# EAGLE board SIDaster_V4 (EAGLE 5.10)
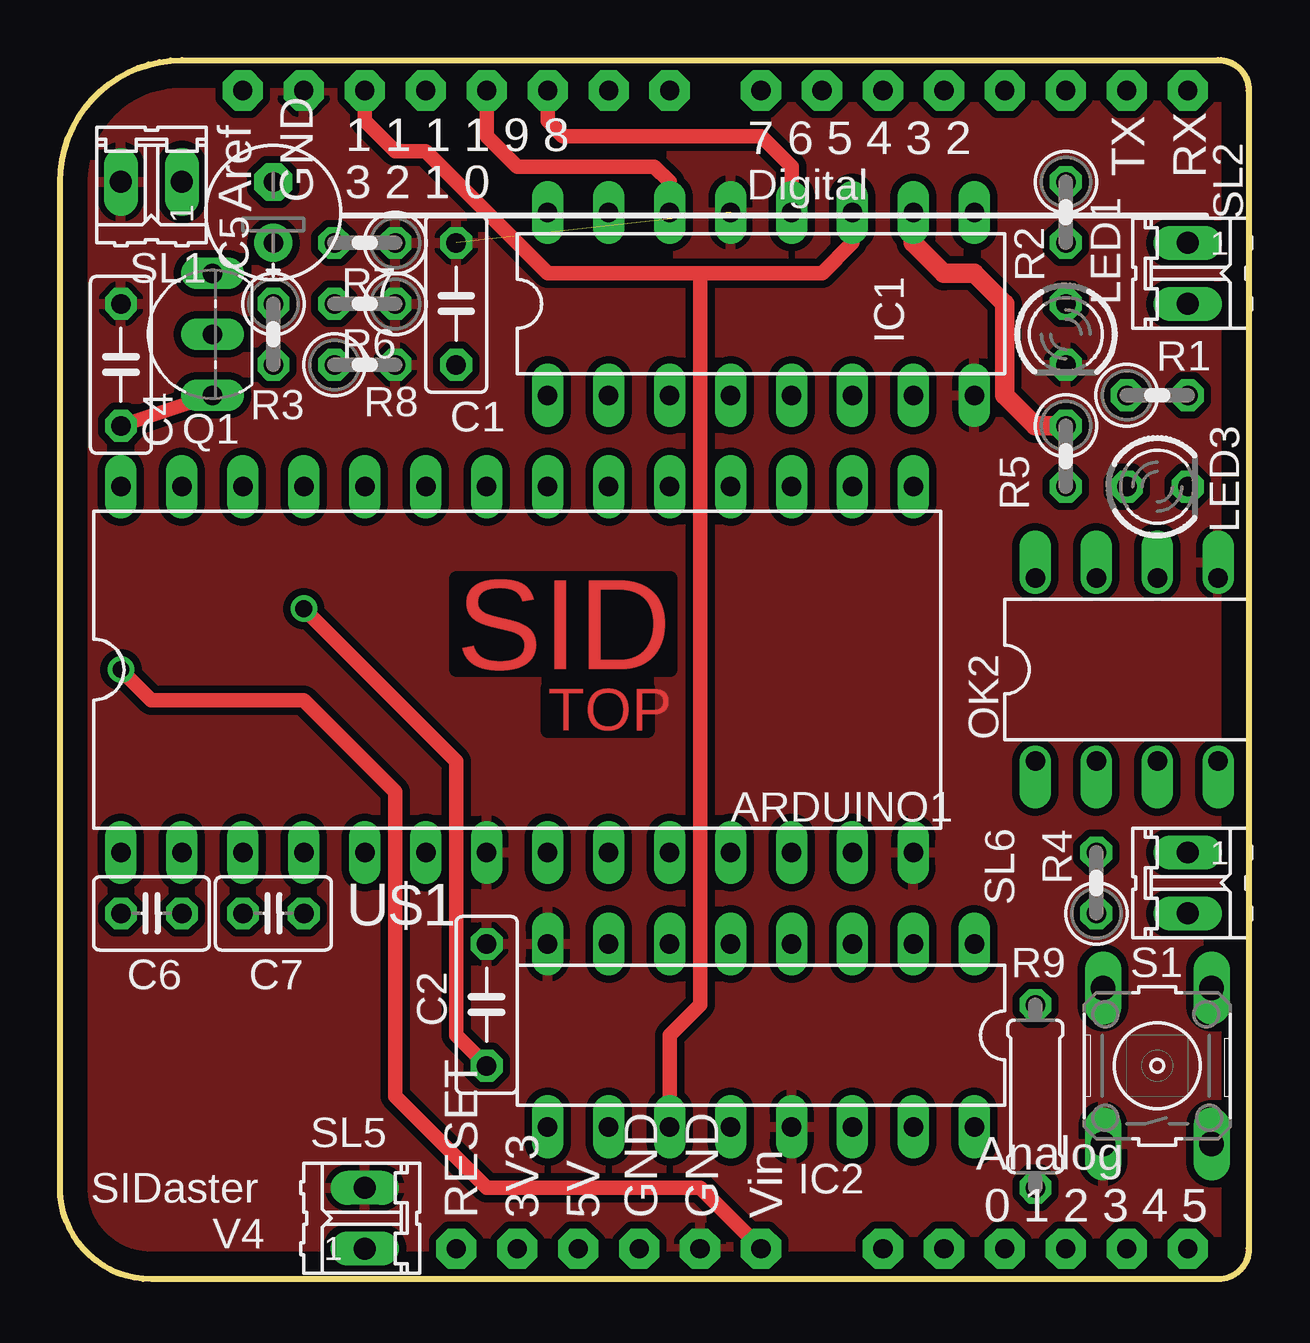
[diagram p0: board, top side]
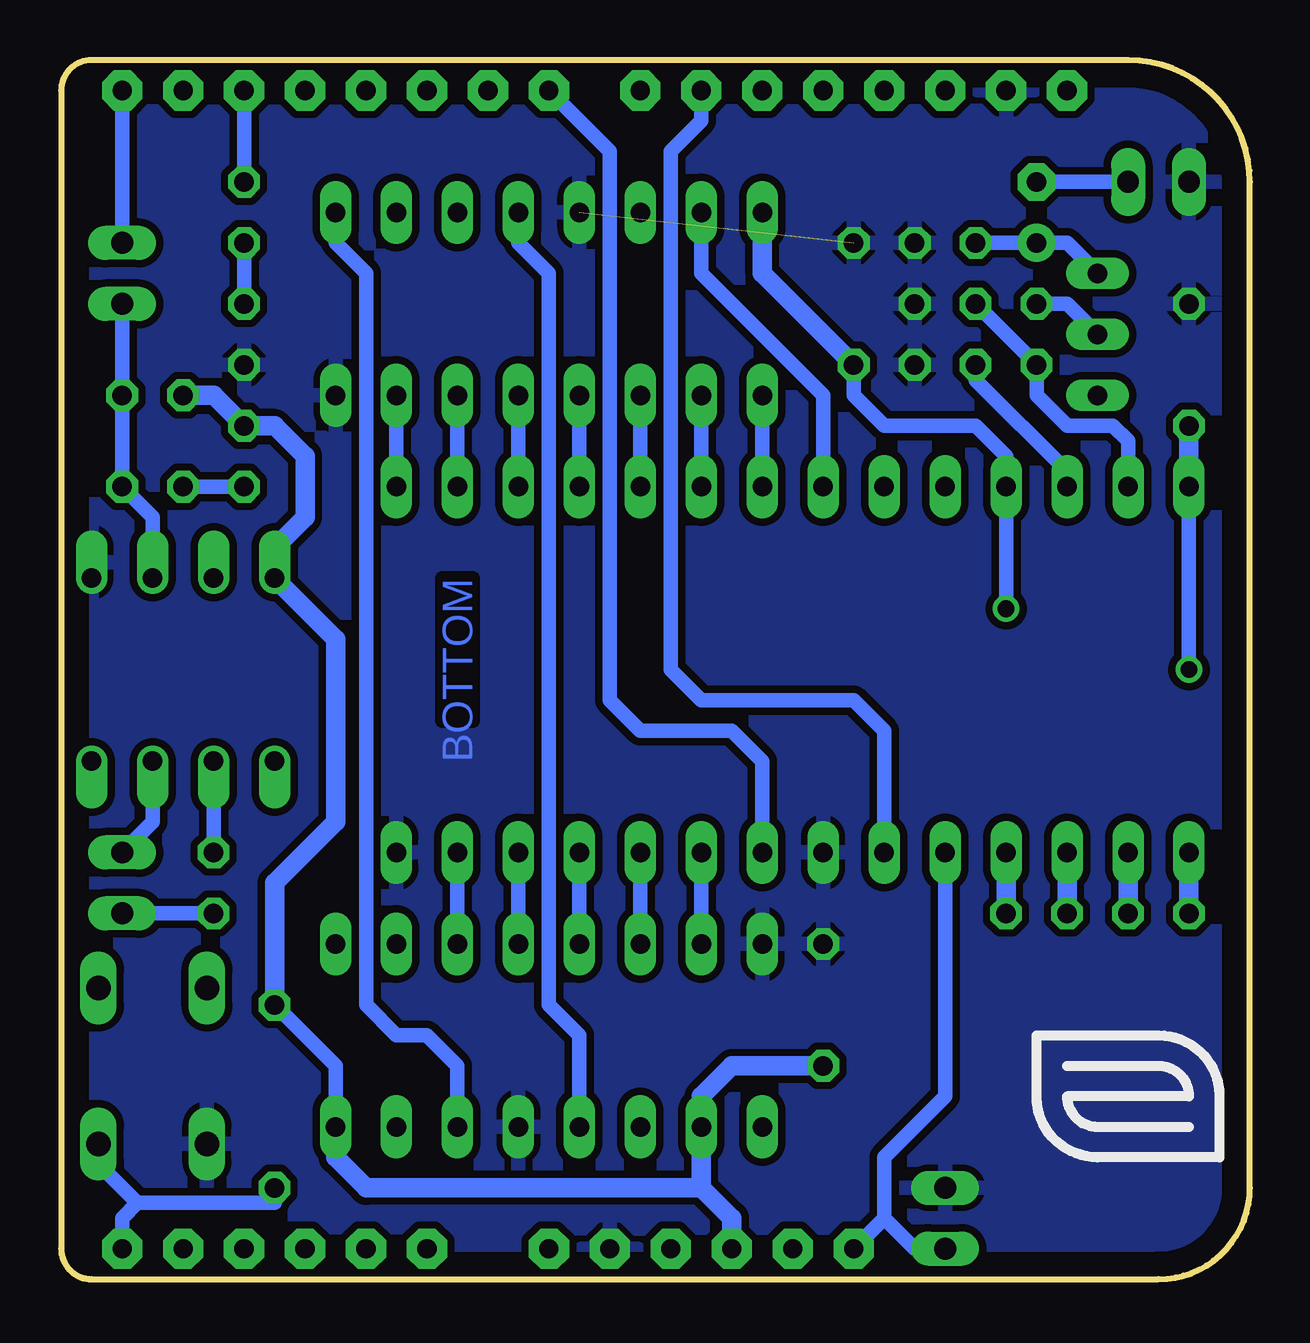
[diagram p1: board, bottom side, seen from below]

Size 49.53 x 50.8 mm. Coordinates in mm from the lower left corner, seen from the top.
Outline: 3.81,0 arc-90 0,3.81 0,45.72 arc-90 5.08,50.8 48.26,50.8 arc-90 49.53,49.53 49.53,1.27 arc-90 48.26,0 3.81,0
Copper layers (1*16): Top 0.035mm / dielectric 1.5mm / Bottom 0.035mm
Design rules "default *": minimum track width 10mil, minimum drill 24mil, track to track 12mil, track to pad 12mil, pad to pad 11mil, via to via 11mil, smd to smd 8mil, copper to edge 40mil, drill to drill 8mil, minimum pad ring 10mil, minimum via ring 8mil, stop-mask expansion 4mil, vias tented up to drill 0mil, thermal gap 10mil

## Footprints (pad centres in the part's own frame; a part is rotated, then mirrored left to right if it is on the bottom)
ARDUINO_DUEMILANOVE = drill 0.8 pad 1.676 octagon: 1 -21.59,22.86; 2 -19.05,22.86; 3 -16.51,22.86; 4 -13.97,22.86; 5 -11.43,22.86; 6 -8.89,22.86; 7 -6.35,22.86; 8 -3.81,22.86; 9 0,22.86; 10 2.54,22.86; 11 5.08,22.86; 12 7.62,22.86; 13 10.16,22.86; 14 12.7,22.86; 15 15.24,22.86; 16 17.78,22.86; 17 17.78,-25.4; 18 15.24,-25.4; 19 12.7,-25.4; 20 10.16,-25.4; 21 7.62,-25.4; 22 5.08,-25.4; 23 0,-25.4; 24 -2.54,-25.4; 25 -5.08,-25.4; 26 -7.62,-25.4; 27 -10.16,-25.4; 28 -12.7,-25.4
C050-025X075 = drill 0.813 octagon: 1 -2.54,0; 2 2.54,0
E2,5-6E = drill 0.813 pad 1.575 round: + -1.27,0 | drill 0.813 pad 1.575 octagon: - 1.27,0
C025-030X050 = drill 0.813 octagon: 1 -1.27,0; 2 1.27,0
DIL16 = drill 0.813 long: 1 -8.89,-3.81; 2 -6.35,-3.81; 3 -3.81,-3.81; 4 -1.27,-3.81; 5 1.27,-3.81; 6 3.81,-3.81; 7 6.35,-3.81; 8 8.89,-3.81; 9 8.89,3.81; 10 6.35,3.81; 11 3.81,3.81; 12 1.27,3.81; 13 -1.27,3.81; 14 -3.81,3.81; 15 -6.35,3.81; 16 -8.89,3.81
LED3MM = drill 0.813 octagon: A -1.27,0; K 1.27,0
DIL08 = drill 0.813 offset: 1 -3.81,-3.81; 2 -1.27,-3.81; 3 1.27,-3.81; 4 3.81,-3.81; 5 3.81,3.81; 6 1.27,3.81; 7 -1.27,3.81; 8 -3.81,3.81
TO92-EBC = drill 0.813 long: B 0,-1.27; C -2.54,-1.27; E 2.54,-1.27
0207/2V = drill 0.813 octagon: 1 -1.27,0; 2 1.27,0
0207/7 = drill 0.813 octagon: 1 -3.81,0; 2 3.81,0
B3F-10XX = drill 1.016 long: 1 -3.251,2.261; 2 3.251,2.261; 3 -3.251,-2.261; 4 3.251,-2.261
02P = drill 0.914 long: 1 -1.27,0; 2 1.27,0
MOS6581 = drill 0.813 long: A0 3.81,-7.62; A1 6.35,-7.62; A2 8.89,-7.62; A3 11.43,-7.62; A4 13.97,-7.62; CAP1A -16.51,-7.62; CAP1B -13.97,-7.62; CAP2A -11.43,-7.62; CAP2B -8.89,-7.62; CS 1.27,-7.62; D0 16.51,7.62; D1 13.97,7.62; D2 11.43,7.62; D3 8.89,7.62; D4 6.35,7.62; D5 3.81,7.62; D6 1.27,7.62; D7 -1.27,7.62; EXTIN -11.43,7.62; GND 16.51,-7.62; O2 -3.81,-7.62; OUT -13.97,7.62; POTX -6.35,7.62; POTY -3.81,7.62; R/W -1.27,-7.62; RES -6.35,-7.62; VCC -8.89,7.62; VDD -16.51,7.62

## Placement (x,y rotation side)
ARDUINO1  ARDUINO_DUEMILANOVE  [ARDUINO_DUEMILANOVE]  29.21,26.67 0 top
C1  100n  [C050-025X075]  16.51,40.64 90 top
C2  100n  [C050-025X075]  17.78,11.43 90 top
C4  100n  [C050-025X075]  2.54,38.1 90 top
C5  10u  [E2,5-6E]  8.89,44.45 90 top
C6  2n  [C025-030X050]  3.81,15.24 0 top
C7  2n  [C025-030X050]  8.89,15.24 0 top
IC1  74HC595N  [DIL16]  29.21,40.64 0 top
IC2  74HC595N  [DIL16]  29.21,10.16 180 top
LED1  [LED3MM]  41.91,39.37 270 top
LED3  [LED3MM]  45.72,33.02 0 top
OK2  6N138  [DIL08]  44.45,25.4 0 top
Q1  BC447  [TO92-EBC]  5.08,39.37 90 top
R1  220  [0207/2V]  45.72,36.83 0 top
R2  1k  [0207/2V]  41.91,44.45 270 top
R3  10k  [0207/2V]  8.89,39.37 270 top
R4  220  [0207/2V]  43.18,16.51 90 top
R5  1k  [0207/2V]  41.91,34.29 270 top
R6  1k  [0207/2V]  12.7,40.64 180 top
R7  1k  [0207/2V]  12.7,43.18 180 top
R8  1k  [0207/2V]  12.7,38.1 0 top
R9  10k  [0207/7]  40.64,7.62 270 top
S1  [B3F-10XX]  45.72,8.89 90 top
SL1  OUT  [02P]  3.81,45.72 180 top
SL2  MIDI  [02P]  46.99,41.91 270 top
SL5  RES  [02P]  12.7,2.54 90 top
SL6  MidiIn  [02P]  46.99,16.51 270 top
U$1  MOS6581  [MOS6581]  19.05,25.4 0 top

## Library data of the parts
ARDUINO1 = arduino
C1 C2 C4-C7 R1-R9 = rcl
IC1 IC2 = 74xx-eu
LED1 LED3 = led
OK2 = optocoupler
Q1 = transistor-npn
S1 = switch-omron
SL1 SL2 SL5 SL6 = con-amp-quick
U$1 = MOS6581

## Nets
3V3: ARDUINO1.27
GND: ARDUINO1.2 ARDUINO1.24 C1.2 C2.2 C4.2 IC1.8 IC1.13 IC2.8 IC2.13 LED1.K OK2.5 R6.1 R7.1 R8.2 S1.1 SL1.2 SL5.2 U$1.GND U$1.R/W
N$1: IC1.7 U$1.D0
N$2: IC1.6 U$1.D1
N$3: IC1.5 U$1.D2
N$4: IC1.4 U$1.D3
N$5: IC1.3 U$1.D4
N$6: IC1.2 U$1.D5
N$7: IC1.1 U$1.D6
N$8: IC2.7 U$1.A0
N$9: IC1.9 IC2.14
N$10: ARDUINO1.7 U$1.O2
N$11: IC2.6 U$1.A1
N$12: IC2.5 U$1.A2
N$13: IC2.4 U$1.A3
N$14: IC2.3 U$1.A4
N$15: IC1.15 U$1.D7
N$16: ARDUINO1.5 IC1.14
N$17: ARDUINO1.9 U$1.CS
N$18: R4.1 SL6.2
N$19: ARDUINO1.28 SL5.1 U$1.RES
N$20: ARDUINO1.3 IC1.11 IC2.11
N$21: C5.- SL1.1
N$22: R3.2 R6.2 U$1.OUT
N$23: OK2.2 R4.2
N$24: C6.1 U$1.CAP1A
N$25: C6.2 U$1.CAP1B
N$26: C7.1 U$1.CAP2A
N$27: C7.2 U$1.CAP2B
N$28: LED1.A R2.2
N$29: ARDUINO1.14 R2.1
N$30: OK2.3 SL6.1
N$31: LED3.K OK2.6 R1.2 SL2.2
N$32: Q1.B R3.1
N$33: C5.+ Q1.E R7.2
N$34: ARDUINO1.16 SL2.1
N$35: R8.1 U$1.EXTIN
N$36: ARDUINO1.17 R9.2 S1.3
N$37: ARDUINO1.6 IC1.12 IC2.12
N$38: LED3.A R5.2
VCC: ARDUINO1.26 C1.1 C2.1 IC1.10 IC1.16 IC2.10 IC2.16 OK2.8 R1.1 R5.1 R9.1 U$1.VCC
VDD: ARDUINO1.23 C4.1 Q1.C U$1.VDD

## Tracks (layer width: path | path; a pad name or v marks a point on that pad's centre or on a via)
GND  (1 unrouted)
  pour Bottom: 5.08,50.8 arc90 0,45.72 0,43.18 0,6.35 arc90 6.35,0 48.26,0 arc90 50.8,2.54 50.8,48.26 arc90 48.26,50.8
  pour Top: 0,50.8 0,0 49.53,0 49.53,50.8
N$1
  Bottom 0.61: U$1.D0 IC1.7
N$2
  Bottom 0.61: U$1.D1 IC1.6
N$3
  Bottom 0.61: U$1.D2 IC1.5
N$4
  Bottom 0.61: U$1.D3 IC1.4
N$5
  Bottom 0.61: U$1.D4 IC1.3
N$6
  Bottom 0.61: U$1.D5 IC1.2
N$7
  Bottom 0.61: U$1.D6 IC1.1
N$8
  Bottom 0.61: IC2.7 U$1.A0
N$9
  Bottom 0.61: IC1.9 38.1,43.18 36.83,41.91 36.83,11.43 35.56,10.16 34.29,10.16 33.02,8.89 IC2.14
N$10
  Bottom 0.61: ARDUINO1.7 22.86,48.26 24.13,46.99 24.13,25.4 22.86,24.13 16.51,24.13 15.24,22.86 U$1.O2
N$11
  Bottom 0.61: IC2.6 U$1.A1
N$12
  Bottom 0.61: IC2.5 U$1.A2
N$13
  Bottom 0.61: IC2.4 U$1.A3
N$14
  Bottom 0.61: IC2.3 U$1.A4
N$15
  Bottom 0.61: U$1.D7 17.78,36.83 22.86,41.91 IC1.15
N$16
  Top 0.61: ARDUINO1.5 17.78,47.62 19.05,46.36 24.77,46.36 25.4,45.72 IC1.14
N$17
  Bottom 0.61: ARDUINO1.9 26.67,46.99 26.67,24.13 25.4,22.86 21.59,22.86 20.32,21.59 U$1.CS
N$18
  Bottom 0.61: R4.1 SL6.2
N$19
  Bottom 0.61: SL5.1 13.97,1.27 15.24,2.54 | 15.24,2.54 15.24,5.08 12.7,7.62 U$1.RES | 15.24,2.54 ARDUINO1.28
N$20
  Top 0.61: ARDUINO1.3 12.7,48.26 13.97,46.99 15.24,46.99 20.32,41.91 26.67,41.91 | 26.67,41.91 31.75,41.91 33.02,43.18 IC1.11 | IC2.11 25.4,10.16 26.67,11.43 26.67,41.91
N$21
  Bottom 0.61: SL1.1 C5.-
N$22
  Bottom 0.61: U$1.OUT 5.08,34.92 5.71,35.56 7.62,35.56 8.89,36.83 R3.2 R6.2
N$23
  Bottom 0.61: R4.2 OK2.2
N$24
  Bottom 0.813: C6.1 U$1.CAP1A
N$25
  Bottom 0.813: C6.2 U$1.CAP1B
N$26
  Bottom 0.813: C7.1 U$1.CAP2A
N$27
  Bottom 0.813: C7.2 U$1.CAP2B
N$28
  Bottom 0.61: LED1.A R2.2
N$29
  Bottom 0.61: R2.1 ARDUINO1.14
N$30
  Bottom 0.61: OK2.3 45.72,19.05 SL6.1
N$31
  Bottom 0.61: SL2.2 R1.2 LED3.K 45.72,31.75 OK2.6
N$32
  Bottom 0.61: R3.1 7.62,40.64 Q1.B
N$33
  Bottom 0.61: R7.2 C5.+ 7.62,43.18 Q1.E
N$34
  Bottom 0.61: SL2.1 ARDUINO1.16
N$35
  Bottom 0.61: U$1.EXTIN 7.62,33.66 11.43,37.47 R8.1
N$36
  Bottom 0.61: R9.2 40.64,3.18 46.36,3.18 | 46.36,3.18 48.26,5.08 48.26,5.36 S1.3 | ARDUINO1.17 46.99,2.54 46.36,3.18
N$37
  Top 0.61: ARDUINO1.6 20.32,48.26 20.96,47.62 29.21,47.62 30.48,46.36 IC1.12
  Bottom 0.61: IC1.12 30.48,43.18 29.21,41.91 29.21,11.43 27.94,10.16 IC2.12
N$38
  Bottom 0.61: R5.2 LED3.A
VCC  (via drill 0.6, 0.7 pad 1.02)
  Top 0.61: C2.1 16.51,10.16 16.51,21.59 v10.16,27.94
  Top 0.813: R5.1 40.64,35.56 39.37,36.83 39.37,40.64 38.1,41.91 36.83,41.91 35.56,43.18 IC1.10
  Bottom 0.61: v10.16,27.94 U$1.VCC 10.16,34.29 11.43,35.56 15.24,35.56 16.51,36.83 C1.1 | IC2.16 38.1,8.89 R9.1
  Bottom 0.813: ARDUINO1.26 21.59,2.54 22.86,3.81 | 22.86,3.81 IC2.10 22.86,7.62 21.59,8.89 C2.1 | IC2.16 38.1,5.08 36.83,3.81 22.86,3.81 | R9.1 40.64,16.51 38.1,19.05 38.1,26.67 OK2.8 40.64,30.48 39.37,31.75 39.37,34.29 40.64,35.56 R5.1 43.18,36.83 R1.1 | IC1.16 20.32,41.91 C1.1
  other vias: 10.16,33.02
VDD  (via drill 0.7 pad 1.02)
  Top 0.61: ARDUINO1.23 26.67,3.81 17.78,3.81 13.97,7.62 13.97,20.32 10.16,24.13 3.81,24.13 v2.54,25.4 | C4.1 Q1.C
  Bottom 0.61: v2.54,25.4 U$1.VDD
  Bottom 0.813: U$1.VDD C4.1

## Text on the board
Top: SID | TOP
Bottom: BOTTOM
tNames: SIDaster | V4